# Altium PCB PCB_EIT_Spectra.pcbdoc (part 1 of 2)
Units mil, origin at the board's own origin, x right, y up, seen from the top; angles counter-clockwise.
Board outline 4400 x 3850 mil, 2 copper layers (Top Layer, Bottom Layer); 90 components, 116 nets, 615 pads, 256 vias.
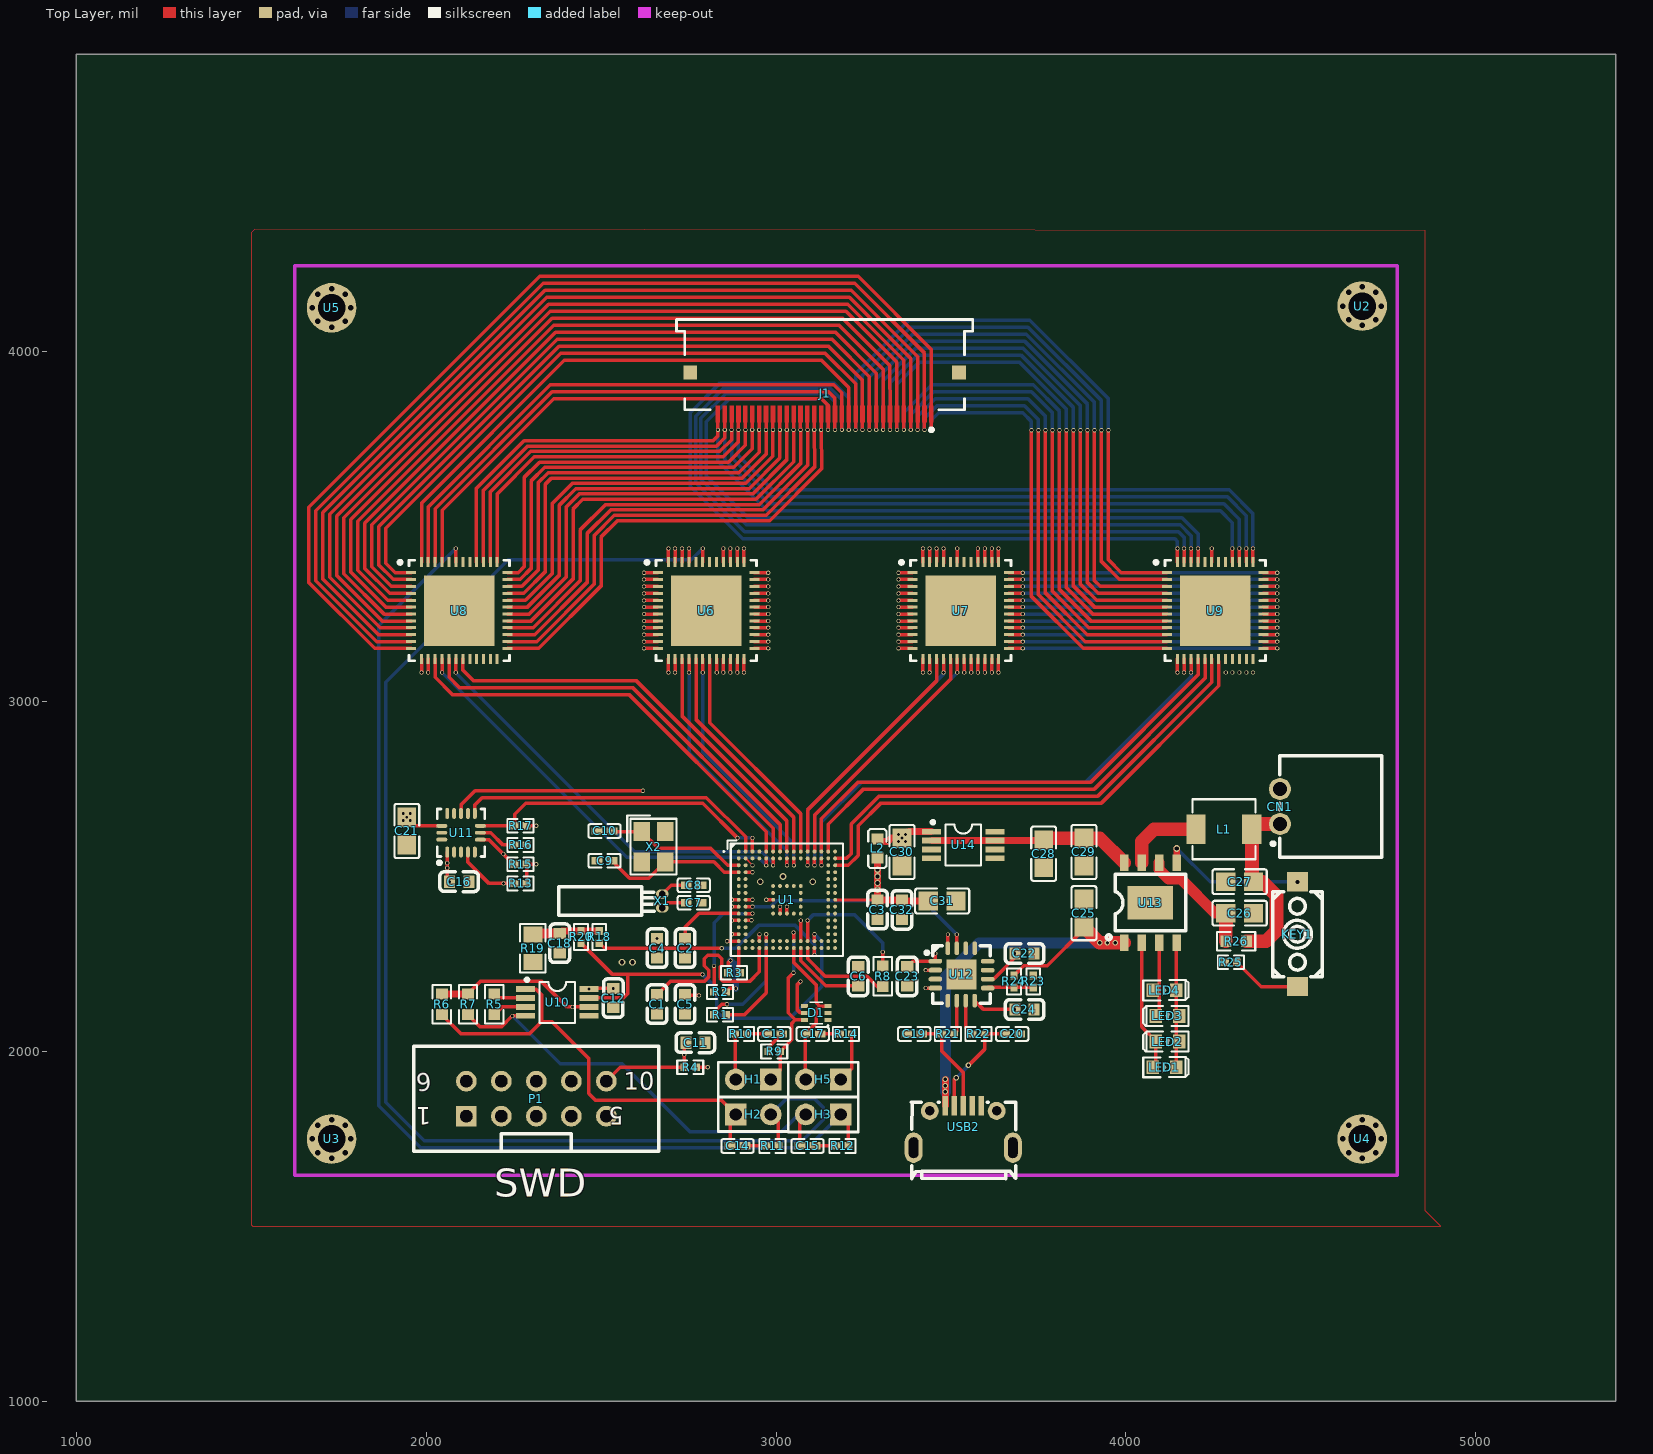
[diagram p0: Top Layer view]
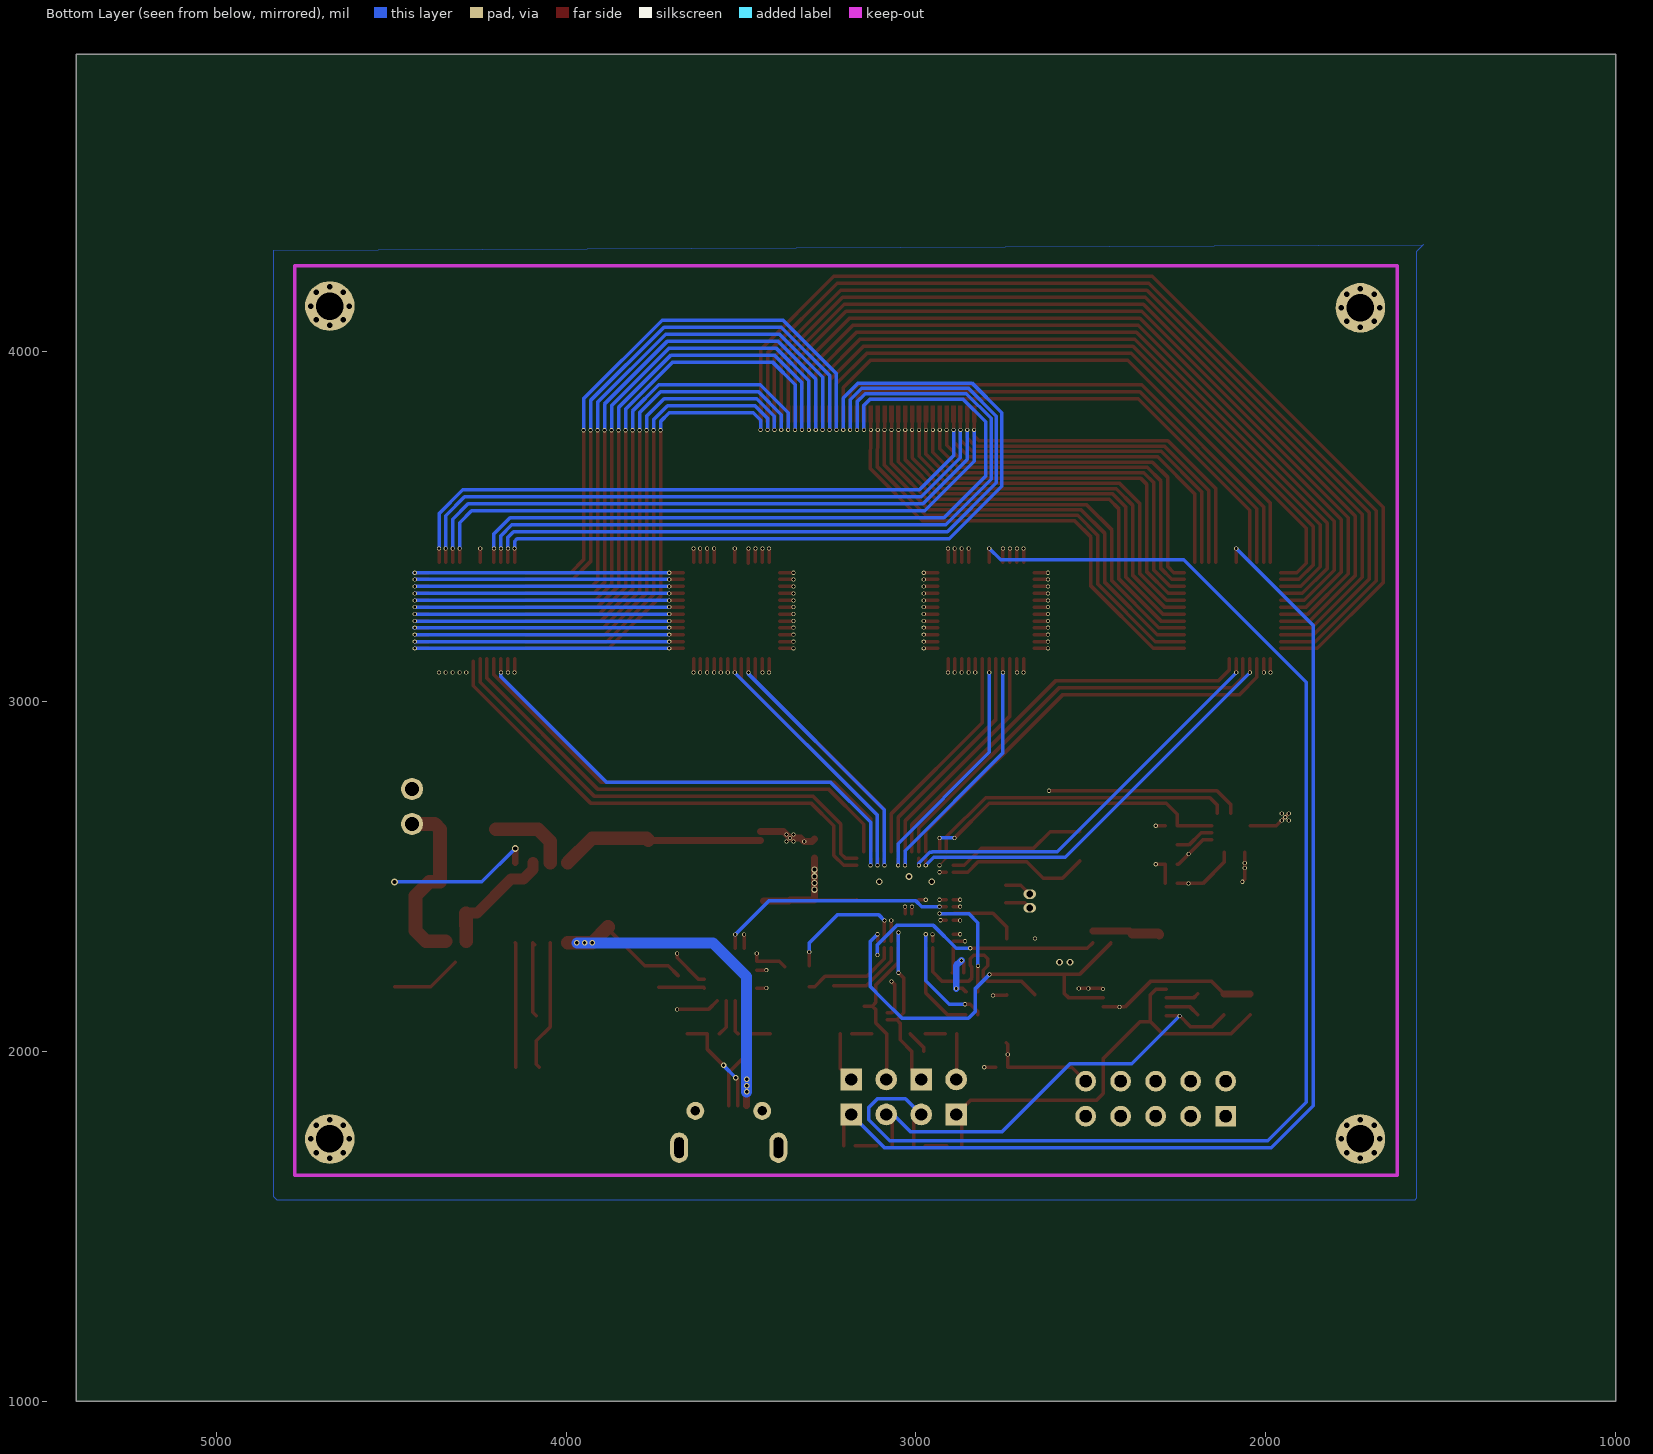
[diagram p1: Bottom Layer view, seen from below]

## Layer stack, top to bottom
Top Layer: signal copper (thickness not stored)
Dielectric: dielectric 12.6, FR-4, Dk 4.8
Bottom Layer: signal copper (thickness not stored)

## Board outline
5400,1000 1000,1000 1000,4850 5400,4850

## Components (designator, comment, footprint, x,y, rotation, side; value= is the part's Value field where it differs from the comment)
C1 "0.47u" C0603 2660,2135 r270 top
C2 "0.47u" C0603 2740,2295 r270 top
C3 "0.47u" C0603 3290,2405 r270 top
C4 "0.1u" C0603 2660,2295 r270 top
C5 "0.47u" C0603 2740,2135 r270 top
C6 "4.7u" C0603 3235,2215 r90 top
C7 "4pf" C0402 2765,2425 r180 top
C8 "4pf" C0402 2765,2475 r180 top
C9 "12pf" C0402 2510,2545 r180 top
C10 "12pf" C0402 2510,2630 r0 top
C11 "0.1u" C0603 2770,2025 r0 top
C12 "0.1u" C0603 2535,2152.56 r90 top
C13 "47n" C0402 2995,2050 r0 top
C14 "47n" C0402 2890,1730 r180 top
C15 "47n" C0402 3090,1730 r180 top
C16 "0.1u" C0603 2095,2485 r0 top
C17 "47n" C0402 3105,2050 r180 top
C18 "0.1u" C0603 2382.24,2309.61 r90 top
C19 "47p" C0402 3395,2050 r0 top
C20 "47p" C0402 3675,2050 r180 top
C21 "10U" C0805 1945,2630 r90 top
C22 "0.1u" C0603 3710,2280 r180 top
C23 "4.7u" C0603 3375,2215 r90 top
C24 "0.1u" C0603 3710,2120 r180 top
C25 "10u" C0805 3880,2395 r270 top
C26 "22u" C0805 4325,2395 r180 top
C27 "22u" C0805 4325,2485 r0 top
C28 "22u" C0805 3765,2565 r90 top
C29 "22u" C0805 3880,2570 r90 top
C30 "10u" C0805 3360,2570 r90 top
C31 "10u" C0805 3475,2430 r180 top
C32 "0.1u" C0603 3360,2405 r90 top
CN1 "XH-2AW_C2908611" CONN-TH_XH-2AW_C2908611 4440,2700 r90 top
D1 "SP3004-04XTG" SOT-563_L1.6-W1.2-P0.50-LS1.6-BR 3115,2110 r0 top
H1 "HDR-F-2.54_1x2" HDR-F-2.54_1X2 2935,1920 r180 top
H2 "HDR-F-2.54_1x2" HDR-F-2.54_1X2 2935,1820 r0 top
H3 "HDR-F-2.54_1x2" HDR-F-2.54_1X2 3135,1820 r180 top
H5 "HDR-F-2.54_1x2" HDR-F-2.54_1X2 3135,1920 r180 top
J1 "54104-3231" MOLX-54104-3231 2755,3940 r180 top
KEY1 "K2-3.6×6.1_SMD" KEY-SMD_2P-L6.2-W3.6-LS8.0 4490,2335 r270 top
L1 "1uH" IND-SMD_L4.4-W4.2 4280,2635 r180 top
L2 "600Ω" L0603 3290,2580 r90 top
LED1 "LED-0603_R" LED0603_RED 4110,1955 r0 top
LED2 "LED-0603_R" LED0603_RED 4118.27,2028.33 r180 top
LED3 "LED-0603_R" LED0603_RED 4118.27,2101.67 r180 top
LED4 "LED-0603_R" LED0603_RED 4110,2175 r0 top
P1 "DC3-10P" DC3-10P-2.54 2115,1815 r0 top
R1 "1k" R0402 2840,2105 r180 top
R2 "560R" R0402 2840,2170 r0 top
R3 "560R" R0402 2880,2225 r0 top
R4 "10k" R0402 2755,1955 r180 top
R5 "100k" R0603 2195,2135 r270 top
R6 "1k" R0603 2045,2135 r90 top
R7 "1k" R0603 2120,2135 r270 top
R8 "33k" R0603 3304.89,2215 r270 top
R9 "3k" R0402 2995,2000 r180 top
R10 "4k7" R0402 2900,2050 r180 top
R11 "4k7" R0402 2990,1730 r0 top
R12 "4k7" R0402 3190,1730 r0 top
R13 "4k7" R0402 2270,2480 r0 top
R14 "4k7" R0402 3200,2050 r0 top
R15 "4k7" R0402 2270,2535 r0 top
R16 "4k7" R0402 2270,2590 r180 top
R17 "4k7" R0402 2270,2645 r0 top
R18 "22.6k" R0402 2495,2327.16 r270 top
R19 "47K" R0805 2305,2295 r90 top
R20 "0k" R0402 2442.78,2327.16 r270 top
R21 "27k" R0402 3491.28,2050 r0 top
R22 "27k" R0402 3578.72,2050 r180 top
R23 "10k" R0402 3735,2200 r90 top
R24 "4k7" R0402 3680,2200 r90 top
R25 "10k" R0402 4300,2255 r0 top
R26 "0.5R" R0603 4315,2315 r0 top
U1 "ADUCM350BBCZ" TFBGA-120_L8.0-W8.0-P0.50-TL 3031.22,2433.49 r0 top
U2 "M2定位孔" M2定位孔 4675,4130 r0 top
U3 "M2定位孔" M2定位孔 1730,1750 r0 top
U4 "M2定位孔" M2定位孔 4675,1750 r0 top
U5 "M2定位孔" M2定位孔 1730,4125 r0 top
U6 "ADG732BCPZ-REEL" ADI-CP-48-1-NO_DRILL 2800.51,3260 r0 top
U7 "ADG732BCPZ-REEL" ADI-CP-48-1-NO_DRILL 3527.75,3260 r0 top
U8 "ADG732BCPZ-REEL" ADI-CP-48-1-NO_DRILL 2095,3260 r0 top
U9 "ADG732BCPZ-REEL" ADI-CP-48-1-NO_DRILL 4255,3260 r0 top
U10 "AD8226ARMZ_C652548" MSOP-8_L3.0-W3.0-P0.65-LS4.9-BL 2375,2140 r270 top
U11 "LIS3DHTR_C15134" LGA-16_L3.0-W3.0-P0.50-TL 2100,2625 r90 top
U12 "FT230XQ-R" QFN-16_L4.0-W4.0-P0.65-BL-EP2.2 3530,2220 r270 top
U13 "IP5306" ESOP-8_L4.9-W3.9-P1.27-LS6.0-BL-EP 4070,2425 r0 top
U14 "ADP3333ARMZ-3.3-R7" MSOP-8_L3.0-W3.0-P0.65-LS4.9-BL 3535,2590 r270 top
USB2 "MICROXNJ" MICRO-USB-SMD_MICROXNJ 3535,1785 r0 top
X1 "32.768KHz" OSC-TH_BD2.1-P0.70-D0.3 2675,2430 r0 top
X2 "TSX-3225 16.0000MF18X-AC6" CRYSTAL-SMD_4P-L3.2-W2.5-BL 2650,2585 r270 top

## Footprints (in the part's own frame and the unit in brackets; to place one, negate y for a bottom-side part, rotate by r counter-clockwise, add the part's x,y. Pads: shape width x height; smd on the part's side, far side on the other; paste and mask are expansions set on the pad)
ADI-CP-48-1-NO_DRILL [mil]
  rect 28.5x8.5 smd: 1(-138,108) 2(-138,89) 3(-138,69) 4(-138,49) 5(-138,29) 6(-138,10) 7(-138,-10) 8(-138,-30) 9(-138,-49) 10(-138,-69) 11(-138,-89) 12(-138,-108) 25(138,-108) 26(138,-89) 27(138,-69) 28(138,-49) 29(138,-30) 30(138,-10) 31(138,10) 32(138,29) 33(138,49) 34(138,69) 35(138,89) 36(138,108)
  rect 8.5x28.5 smd: 13(-108,-138) 14(-89,-138) 15(-69,-138) 16(-49,-138) 17(-29,-138) 18(-10,-138) 19(10,-138) 20(30,-138) 21(49,-138) 22(69,-138) 23(89,-138) 24(108,-138) 37(108,138) 38(89,138) 39(69,138) 40(49,138) 41(30,138) 42(10,138) 43(-10,138) 44(-29,138) 45(-49,138) 46(-69,138) 47(-89,138) 48(-108,138)
  rect 201.5x201.5 smd: 49(0,0)
  silkscreen extent -174,-144 144,144
C0402 [mm]
  rect 0.79x0.54 smd: 1(-0.545,0) 2(0.545,0)
  silkscreen extent -1.17,-0.5 1.17,0.5
C0603 [mm]
  rect 0.8x0.9 smd: 1(-0.7,0) 2(0.7,0)
  silkscreen extent -1.41,-0.71 1.39,0.72
C0805 [mm]
  rect 1.41x1.35 smd: 1(-1,0) 2(1,0)
  silkscreen extent -1.96,-0.9 1.96,0.9
CONN-TH_XH-2AW_C2908611 [mm]
  round 1.6 hole 1: 1(-1.27,0) 2(1.27,0)
  silkscreen extent -3.7,-7.4 3.7,0.6
CRYSTAL-SMD_4P-L3.2-W2.5-BL [mm]
  rect 1.4x1.2 smd: 1(-1.1,-0.85) 2(1.1,-0.85) 3(1.1,0.85) 4(-1.1,0.85)
  silkscreen extent -2.26,-1.91 2.03,1.68
DC3-10P-2.54 [mil]
  rect 59.06x59.06 hole 35.44 slot 35.45 at 0 deg: 1(0,0)
  round 59.06 hole 35.44 slot 35.45 at 0 deg: 2(100,0) 3(200,0) 4(300,0) 5(400,0) 6(0,100) 7(100,100) 8(200,100) 9(300,100) 10(400,100)
  silkscreen extent -150,-100 550,200
ESOP-8_L4.9-W3.9-P1.27-LS6.0-BL-EP [mm]
  rect 0.6x1.2 smd: 1(-1.905,-2.908) 2(-0.635,-2.908) 3(0.635,-2.908) 4(1.905,-2.908) 5(1.905,2.908) 6(0.635,2.908) 7(-0.635,2.908) 8(-1.905,2.908)
  rect 3.3x2.4 smd: 9(0,0)
  silkscreen extent -3.2,-2.67 2.55,2.05
HDR-F-2.54_1X2 [mil]
  rect 62x62 hole 35: 1(-50,0)
  round 62 hole 35: 2(50,0)
  silkscreen extent -100,-49 100,50
IND-SMD_L4.4-W4.2 [mm]
  rect 1.4x2.12 smd: 1(2.028,0) 2(-2.028,0)
  silkscreen extent -2.28,-2.18 2.28,2.18
KEY-SMD_2P-L6.2-W3.6-LS8.0 [mm]
  rect 1.4x1.5 smd: 1(-3.8,0) 2(3.8,0)
  silkscreen extent -3.1,-1.8 3.1,1.8
L0603 [mm]
  rect 0.8x0.864 smd: 1(-0.7,0) 2(0.7,0)
  silkscreen extent -1.42,-0.65 1.41,0.67
LED0603_RED [mm]
  rect 0.9x1 smd: 1(-0.85,0) 2(0.85,0)
  silkscreen extent -1.54,-0.73 1.75,0.73
LGA-16_L3.0-W3.0-P0.50-TL [mm]
  oval 0.8x0.28 smd: 1(-1.4,1) 2(-1.4,0.5) 3(-1.4,0) 4(-1.4,-0.5) 5(-1.4,-1) 9(1.4,-1) 10(1.4,-0.5) 11(1.4,0) 12(1.4,0.5) 13(1.4,1)
  oval 0.28x0.8 smd: 6(-0.5,-1.4) 7(0,-1.4) 8(0.5,-1.4) 14(0.5,1.4) 15(0,1.4) 16(-0.5,1.4)
  silkscreen extent -2.3,-1.72 1.73,1.73
M2定位孔 [mm]
  round 0.6 hole 0.4: GND(-1.4,0) GND(-0.99,-0.99) GND(-0.99,0.99) GND(0,1.4) GND(0,-1.4) GND(0.99,-0.99) GND(0.99,0.99) GND(1.4,0)
  round 3.6 hole 2: GND(0,0)
MICRO-USB-SMD_MICROXNJ [mm]
  rect 0.4x1.4 smd: 1(-1.3,1.521) 2(-0.65,1.521) 3(0,1.521) 4(0.65,1.521) 5(1.3,1.521)
  round 1.3 hole 0.7: 6(2.425,1.149) 9(-2.425,1.149)
  oval 1.3x2.2 hole 0.7 slot 1.5 at 90 deg: 7(3.6,-1.521) 8(-3.6,-1.521)
  silkscreen extent -3.76,-3.78 3.8,1.79
MOLX-54104-3231 [mm]
  round 0 smd: 1(-17.5,3) 2(-17,3) 3(-16.5,3) 4(-16,3) 5(-15.5,3) 6(-15,3) 7(-14.5,3) 8(-14,3) 9(-13.5,3) 10(-13,3) 11(-12.5,3) 12(-12,3) 13(-11.5,3) 14(-11,3) 15(-10.5,3) 16(-10,3) 17(-9.5,3) 18(-9,3) 19(-8.5,3) 20(-8,3) 21(-7.5,3) 22(-7,3) 23(-6.5,3) 24(-6,3) 25(-5.5,3) 26(-5,3) 27(-4.5,3) 28(-4,3) 29(-3.5,3) 30(-3,3) 31(-2.5,3) 32(-2,3)
  rect 1x1 smd: MP1(-19.5,0) MP2(0,0)
  Top Layer region: -3.15,3.6 -2.85,3.6 -2.85,2.4 -3.15,2.4
  Top Layer region: -3.65,3.6 -3.35,3.6 -3.35,2.4 -3.65,2.4
  Top Layer region: -4.15,3.6 -3.85,3.6 -3.85,2.4 -4.15,2.4
  Top Layer region: -4.65,3.6 -4.35,3.6 -4.35,2.4 -4.65,2.4
  Top Layer region: -5.15,3.6 -4.85,3.6 -4.85,2.4 -5.15,2.4
  Top Layer region: -5.65,3.6 -5.35,3.6 -5.35,2.4 -5.65,2.4
  Top Layer region: -6.15,3.6 -5.85,3.6 -5.85,2.4 -6.15,2.4
  Top Layer region: -6.65,3.6 -6.35,3.6 -6.35,2.4 -6.65,2.4
  Top Layer region: -7.15,3.6 -6.85,3.6 -6.85,2.4 -7.15,2.4
  Top Layer region: -7.65,3.6 -7.35,3.6 -7.35,2.4 -7.65,2.4
  Top Layer region: -8.15,3.6 -7.85,3.6 -7.85,2.4 -8.15,2.4
  Top Layer region: -8.65,3.6 -8.35,3.6 -8.35,2.4 -8.65,2.4
  Top Layer region: -9.15,3.6 -8.85,3.6 -8.85,2.4 -9.15,2.4
  Top Layer region: -9.65,3.6 -9.35,3.6 -9.35,2.4 -9.65,2.4
  Top Layer region: -10.15,3.6 -9.85,3.6 -9.85,2.4 -10.15,2.4
  Top Layer region: -10.65,3.6 -10.35,3.6 -10.35,2.4 -10.65,2.4
  Top Layer region: -11.15,3.6 -10.85,3.6 -10.85,2.4 -11.15,2.4
  Top Layer region: -11.65,3.6 -11.35,3.6 -11.35,2.4 -11.65,2.4
  Top Layer region: -12.15,3.6 -11.85,3.6 -11.85,2.4 -12.15,2.4
  Top Layer region: -12.65,3.6 -12.35,3.6 -12.35,2.4 -12.65,2.4
  Top Layer region: -13.15,3.6 -12.85,3.6 -12.85,2.4 -13.15,2.4
  Top Layer region: -13.65,3.6 -13.35,3.6 -13.35,2.4 -13.65,2.4
  Top Layer region: -14.15,3.6 -13.85,3.6 -13.85,2.4 -14.15,2.4
  Top Layer region: -14.65,3.6 -14.35,3.6 -14.35,2.4 -14.65,2.4
  Top Layer region: -15.15,3.6 -14.85,3.6 -14.85,2.4 -15.15,2.4
  Top Layer region: -15.65,3.6 -15.35,3.6 -15.35,2.4 -15.65,2.4
  Top Layer region: -16.15,3.6 -15.85,3.6 -15.85,2.4 -16.15,2.4
  Top Layer region: -16.65,3.6 -16.35,3.6 -16.35,2.4 -16.65,2.4
  Top Layer region: -17.15,3.6 -16.85,3.6 -16.85,2.4 -17.15,2.4
  Top Layer region: -17.65,3.6 -17.35,3.6 -17.35,2.4 -17.65,2.4
  Top Layer region: -2.65,3.6 -2.35,3.6 -2.35,2.4 -2.65,2.4
  Top Layer region: -2.15,3.6 -1.85,3.6 -1.85,2.4 -2.15,2.4
  silkscreen extent -20.5,-3.85 1,4.27
MSOP-8_L3.0-W3.0-P0.65-LS4.9-BL [mil]
  rect 15.98x55 smd: 1(-38.39,-90.55) 2(-12.8,-90.55) 3(12.8,-90.55) 4(38.39,-90.55) 5(38.39,90.55) 6(12.8,90.56) 7(-12.8,90.55) 8(-38.39,90.55)
  silkscreen extent -70,-91 59,51
OSC-TH_BD2.1-P0.70-D0.3 [mm]
  oval 0.9x0.7 hole 0.5: 1(0,0.5) 2(0,-0.5)
  silkscreen extent -7.5,-1.05 -0.57,1.05
QFN-16_L4.0-W4.0-P0.65-BL-EP2.2 [mm]
  oval 0.35x1 smd: 1(-0.965,-1.9) 2(-0.315,-1.9) 3(0.335,-1.9) 4(0.986,-1.9) 9(0.991,1.9) 10(0.34,1.9) 11(-0.31,1.9) 12(-0.96,1.9)
  oval 1x0.35 smd: 5(1.9,-0.991) 6(1.9,-0.34) 7(1.9,0.31) 8(1.9,0.96) 13(-1.9,0.96) 14(-1.9,0.31) 15(-1.9,-0.34) 16(-1.9,-0.991)
  rect 2.2x2.2 smd: 17(0,0)
  silkscreen extent -2.11,-2.64 2.1,2.1
R0402 [mm]
  rect 0.566x0.54 smd: 1(-0.433,0) 2(0.433,0)
  silkscreen extent -0.94,-0.5 0.94,0.5
R0603 [mil]
  rect 31.75x34.02 smd: 1(-29.66,0) 2(29.66,0)
  silkscreen extent -55,-26 55,26
R0805 [mil]
  rect 44.59x54.21 smd: 1(-39.37,0) 2(39.37,0)
  silkscreen extent -69,-36 69,36
SOT-563_L1.6-W1.2-P0.50-LS1.6-BR [mm]
  rect 0.5x0.3 smd: 1(0.85,-0.5) 2(0.85,0) 3(0.85,0.5) 4(-0.85,0.5) 5(-0.85,0) 6(-0.85,-0.5)
  silkscreen extent -0.48,-0.99 0.9,0.79
TFBGA-120_L8.0-W8.0-P0.50-TL [mm]
  round 0.28 smd: A1(-3.5,3.5) A2(-3,3.5) A3(-2.5,3.5) A4(-2,3.5) A5(-1.5,3.5) A6(-1,3.5) A7(-0.5,3.5) A8(0,3.5) A9(0.5,3.5) A10(1,3.5) A11(1.5,3.5) A12(2,3.5) A13(2.5,3.5) A14(3,3.5) A15(3.5,3.5) B1(-3.5,3) B2(-3,3) B3(-2.5,3) B4(-2,3) B5(-1.5,3) B6(-1,3) B7(-0.5,3) B8(0,3) B9(0.5,3) B10(1,3) B11(1.5,3) B12(2,3) B13(2.5,3) B14(3,3) B15(3.5,3) C1(-3.5,2.5) C2(-3,2.5) C14(3,2.5) C15(3.5,2.5) D1(-3.5,2) D2(-3,2) D14(3,2) D15(3.5,2) E1(-3.5,1.5) E2(-3,1.5) E14(3,1.5) E15(3.5,1.5) F1(-3.5,1) F2(-3,1) F6(-1,1) F7(-0.5,1) F8(0,1) F9(0.5,1) F10(1,1) F14(3,1) F15(3.5,1) G1(-3.5,0.5) G2(-3,0.5) G6(-1,0.5) G10(1,0.5) G14(3,0.5) G15(3.5,0.5) H1(-3.5,0) H2(-3,0) H6(-1,0) H10(1,0) H14(3,0) H15(3.5,0) J1(-3.5,-0.5) J2(-3,-0.5) J6(-1,-0.5) J10(1,-0.5) J14(3,-0.5) J15(3.5,-0.5) K1(-3.5,-1) K2(-3,-1) K6(-1,-1) K7(-0.5,-1) K8(0,-1) K9(0.5,-1) K10(1,-1) K14(3,-1) K15(3.5,-1) L1(-3.5,-1.5) L2(-3,-1.5) L14(3,-1.5) L15(3.5,-1.5) M1(-3.5,-2) M2(-3,-2) M14(3,-2) M15(3.5,-2) N1(-3.5,-2.5) N2(-3,-2.5) N14(3,-2.5) N15(3.5,-2.5) P1(-3.5,-3) P2(-3,-3) P3(-2.5,-3) P4(-2,-3) P5(-1.5,-3) P6(-1,-3) P7(-0.5,-3) P8(0,-3) P9(0.5,-3) P10(1,-3) P11(1.5,-3) P12(2,-3) P13(2.5,-3) P14(3,-3) P15(3.5,-3) R1(-3.5,-3.5) R2(-3,-3.5) R3(-2.5,-3.5) R4(-2,-3.5) R5(-1.5,-3.5) R6(-1,-3.5) R7(-0.5,-3.5) R8(0,-3.5) R9(0.5,-3.5) R10(1,-3.5) R11(1.5,-3.5) R12(2,-3.5) R13(2.5,-3.5) R14(3,-3.5) R15(3.5,-3.5)
  silkscreen extent -4.63,-4.08 4.08,4.3

## Via types
v1: diameter 11.81, hole 7.87, Top Layer to Bottom Layer, tented both sides, 237 vias
v2: diameter 15.75, hole 9.84, Top Layer to Bottom Layer, tented both sides, 8 vias
v3: diameter 19.69, hole 11.81, Top Layer to Bottom Layer, tented both sides, 7 vias
v4: diameter 17.72, hole 11.81, Top Layer to Bottom Layer, tented both sides, 4 vias

## Nets (pads, with @x,y where several pads share a name; then routed paths per layer and width w, separated by ;. In a path a pad name is that pad's centre, name@x,y a point inside that pad or via, vN(x,y) a via of type N, cw(c..) or ccw(c..) an arc to the next point about the centre after c; other vN are vias at no path point)
1: J1.1 U6.12 U7.12 U8.12 U9.12 | length 10101.5
  Top Layer w10: U8.12@1957,3152 1853,3152 1665,3340 1665,3555 2325,4215 3235,4215 3444,4006 J1.1@3443.98,3821.89 v1(3443.98,3776.26) ; v1(2623.12,3152) U6.12@2662.51,3151.99 ; v1(3350.38,3152) U7.12@3389.75,3152 ; v1(3729.99,3775.01) 3729.99,3300.01 3878,3152 U9.12@4117,3152
  Mid-Layer 2 w10: v1(2623.12,3152) 2548,3152 2340,3360 2340,3875 2640,4175 3205,4175 3444,3936 v1(3443.98,3776.26)
  Mid-Layer 3 w10: v1(3350.38,3152) 3217,3152 3172.2,3107.2 3172.2,3007.2 3000,2835 2600,2835 2365,3070 2365,3740 2765,4140 3215,4140 3443.98,3911.02 v1(3443.98,3776.26)
  Bottom Layer w10: v1(3443.98,3776.26) 3444,3804 3465,3825 3705,3825 3730,3800 v1(3729.99,3775.01)
2: J1.2 U6.11 U7.11 U8.11 U9.11 | length 9847
  Top Layer w10: U8.11@1957,3171 1859,3171 1685,3345 1685,3545 2335,4195 3225,4195 3424.29,3995.71 J1.2@3424.29,3821.89 v1(3424.29,3776.26) ; v1(2623.12,3171) U6.11@2662.51,3170.99 ; v1(3350.38,3171) U7.11@3389.75,3171 ; v1(3749.99,3775.01) 3749.99,3305.01 3884,3171 U9.11@4117,3171
  Mid-Layer 2 w10: v1(2623.12,3171) 2554,3171 2360,3365 2360,3870 2645,4155 3200,4155 3424.3,3930.7 v1(3424.29,3776.26)
  Mid-Layer 3 w10: v1(3350.38,3171) 3211,3171 3157,3117 3157,3017 2995,2855 2605,2855 2385,3075 2385,3735 2770,4120 3210,4120 3424.29,3905.71 v1(3424.29,3776.26)
  Bottom Layer w10: v1(3424.29,3776.26) 3424.3,3809.3 3460,3845 3710,3845 3750,3805 v1(3749.99,3775.01)
3: J1.3 U6.10 U7.10 U8.10 U9.10 | length 9594.8
  Top Layer w10: U8.10@1957,3191 1864,3191 1705,3350 1705,3540 2340,4175 3215,4175 3404.6,3985.4 J1.3@3404.61,3821.89 v1(3404.61,3776.26) ; v1(2623.12,3191) U6.10@2662.51,3190.99 ; v1(3350.38,3191) U7.10@3389.75,3191 ; v1(3769.99,3775.01) 3769.99,3310.01 3889,3191 U9.10@4117,3191
  Mid-Layer 2 w10: v1(2623.12,3191) 2559,3191 2380,3370 2380,3865 2650,4135 3190,4135 3405,3920 v1(3404.61,3776.26)
  Mid-Layer 3 w10: v1(3350.38,3191) 3206,3191 3141.8,3126.8 3141.8,3026.8 2990,2875 2610,2875 2405,3080 2405,3730 2775,4100 3205,4100 3404.61,3900.39 v1(3404.61,3776.26)
  Bottom Layer w10: v1(3404.61,3776.26) 3404.61,3814.61 3455,3865 3720,3865 3769.99,3815.01 v1(3769.99,3775.01)
4: J1.4 U6.9 U7.9 U8.9 U9.9 | length 9348.1
  Top Layer w10: U8.9@1957,3211 1869,3211 1725,3355 1725,3535 2345,4155 3210,4155 3384.9,3980.1 J1.4@3384.92,3821.89 v1(3384.92,3776.26) ; v1(2623.12,3211) U6.9@2662.51,3210.99 ; v1(3350.38,3211) U7.9@3389.75,3211 ; v1(3789.99,3775.01) 3789.99,3315.01 3894,3211 U9.9@4117,3211
  Mid-Layer 2 w10: v1(2623.12,3211) 2564,3211 2400,3375 2400,3860 2655,4115 3185,4115 3384.92,3915.08 v1(3384.92,3776.26)
  Mid-Layer 3 w10: v1(3350.38,3211) 3201,3211 3126.6,3136.6 3126.6,3036.6 2985,2895 2615,2895 2425,3085 2425,3725 2780,4080 3200,4080 3384.9,3895.1 v1(3384.92,3776.26)
  Bottom Layer w10: v1(3384.92,3776.26) 3384.92,3819.92 3450,3885 3730,3885 3789.99,3825.01 v1(3789.99,3775.01)
5: J1.5 U6.8 U7.8 U8.8 U9.8 | length 9099.3
  Top Layer w10: U8.8@1957,3230 1875,3230 1745,3360 1745,3530 2350,4135 3205,4135 3365,3975 J1.5@3365.24,3821.89 ; v1(2623.12,3230) U6.8@2662.51,3229.99 ; v1(3350.38,3230) U7.8@3389.75,3230 ; v1(3365.24,3776.26) J1.5@3365.24,3821.89 ; v1(3809.99,3775.01) 3809.99,3320.01 3900,3230 U9.8@4117,3230
  Mid-Layer 2 w10: v1(2623.12,3230) 2570,3230 2420,3380 2420,3855 2660,4095 3180,4095 3365,3910 v1(3365.24,3776.26)
  Mid-Layer 3 w10: v1(3350.38,3230) 3195,3230 3111.4,3146.4 3111.4,3046.4 2980,2915 2620,2915 2445,3090 2445,3720 2785,4060 3195,4060 3365.24,3889.76 v1(3365.24,3776.26)
  Bottom Layer w10: v1(3365.24,3776.26) 3365.24,3825.24 3445,3905 3735,3905 3809.99,3830.01 v1(3809.99,3775.01)
6: J1.6 U6.7 U7.7 U8.7 U9.7 | length 8930.8
  Top Layer w10: U8.7@1957,3250 1880,3250 1765,3365 1765,3525 2355,4115 3200,4115 3345,3970 J1.6@3345.55,3821.89 ; v1(2623.12,3250) U6.7@2662.51,3249.99 ; v1(3345.55,3776.26) J1.6@3345.55,3821.89 ; v1(3350.38,3250) U7.7@3389.75,3250 ; v1(3829.99,3775.01) 3829.99,3325.01 3905,3250 U9.7@4117,3250
  Mid-Layer 2 w10: v1(2623.12,3250) 2575,3250 2440,3385 2440,3850 2665,4075 3175,4075 3345,3905 v1(3345.55,3776.26)
  Mid-Layer 3 w10: v1(3345.55,3776.26) 3345.55,3884.45 3190,4040 2790,4040 2465,3715 2465,3095 2625,2935 2975,2935 3096.2,3056.2 3096.2,3156.2 3190,3250 v1(3350.38,3250)
  Bottom Layer w10: v1(3345.55,3776.26) 3345.55,3905.55 3410,3970 3695,3970 3829.99,3835.01 v1(3829.99,3775.01)
7: J1.7 U6.6 U7.6 U8.6 U9.6 | length 8678.6
  Top Layer w10: U8.6@1957,3270 1885,3270 1785,3370 1785,3520 2360,4095 3190,4095 3325,3960 J1.7@3325.87,3821.89 ; v1(2623.12,3270) U6.6@2662.51,3269.99 ; v1(3325.87,3776.26) J1.7@3325.87,3821.89 ; v1(3350.38,3270) U7.6@3389.75,3270 ; v1(3849.99,3775.01) 3849.99,3330.01 3910,3270 U9.6@4117,3270
  Mid-Layer 2 w10: v1(2623.12,3270) 2580,3270 2460,3390 2460,3845 2670,4055 3170,4055 3325.9,3899.1 v1(3325.87,3776.26)
  Mid-Layer 3 w10: v1(3325.87,3776.26) 3325.87,3879.13 3185,4020 2795,4020 2485,3710 2485,3100 2630,2955 2970,2955 3081,3066 3081,3166 3185,3270 v1(3350.38,3270)
  Bottom Layer w10: v1(3325.87,3776.26) 3325.87,3910.87 3405,3990 3700,3990 3849.99,3840.01 v1(3849.99,3775.01)
8: J1.8 U6.5 U7.5 U8.5 U9.5 | length 8427.3
  Top Layer w10: U8.5@1957,3289 1891,3289 1805,3375 1805,3515 2365,4075 3180,4075 3306.2,3948.8 J1.8@3306.18,3821.89 v1(3306.18,3776.26) ; v1(2623.12,3289) U6.5@2662.51,3288.99 ; v1(3350.38,3289) U7.5@3389.75,3289 ; v1(3869.99,3775.01) 3869.99,3335.01 3916,3289 U9.5@4117,3289
  Mid-Layer 2 w10: v1(2623.12,3289) 2586,3289 2480,3395 2480,3840 2675,4035 3165,4035 3306.2,3893.8 v1(3306.18,3776.26)
  Mid-Layer 3 w10: v1(3306.18,3776.26) 3306.2,3873.8 3180,4000 2800,4000 2505,3705 2505,3105 2635,2975 2965,2975 3065.8,3075.8 3065.8,3175.8 3179,3289 v1(3350.38,3289)
  Bottom Layer w10: v1(3306.18,3776.26) 3306.18,3916.18 3400,4010 3705,4010 3869.99,3845.01 v1(3869.99,3775.01)
9: J1.9 U6.4 U7.4 U8.4 U9.4 | length 8172.1
  Top Layer w10: U8.4@1957,3309 1896,3309 1825,3380 1825,3510 2370,4055 3170,4055 3286.5,3938.5 J1.9@3286.5,3821.89 v1(3286.5,3776.26) ; v1(2623.12,3309) U6.4@2662.51,3308.99 ; v1(3350.38,3309) U7.4@3389.75,3309 ; v1(3889.99,3775.01) 3889.99,3340.01 3921,3309 U9.4@4117,3309
  Mid-Layer 2 w10: v1(2623.12,3309) 2591,3309 2500,3400 2500,3835 2680,4015 3160,4015 3285,3890 3285,3777.76 v1(3286.5,3776.26)
  Mid-Layer 3 w10: v1(3286.5,3776.26) 3286.5,3868.5 3175,3980 2810,3980 2525,3695 2525,3110 2640,2995 2960,2995 3050.6,3085.6 3050.6,3185.6 3174,3309 v1(3350.38,3309)
  Bottom Layer w10: v1(3286.5,3776.26) 3286.5,3921.5 3395,4030 3710,4030 3889.99,3850.01 v1(3889.99,3775.01)
10: J1.10 U6.3 U7.3 U8.3 U9.3 | length 7919.6
  Top Layer w10: U8.3@1957,3329 1901,3329 1845,3385 1845,3505 2375,4035 3160,4035 3266.8,3928.2 J1.10@3266.81,3821.89 v1(3266.81,3776.26) ; v1(2623.12,3329) U6.3@2662.51,3328.99 ; v1(3350.38,3329) U7.3@3389.75,3329 ; v1(3909.99,3775.01) 3909.99,3345.01 3926,3329 U9.3@4117,3329
  Mid-Layer 2 w10: v1(2623.12,3329) 2596,3329 2520,3405 2520,3830 2685,3995 3155,3995 3266.8,3883.2 v1(3266.81,3776.26)
  Mid-Layer 3 w10: v1(3266.81,3776.26) 3266.8,3863.2 3170,3960 2815,3960 2545,3690 2545,3115 2645,3015 2955,3015 3035.4,3095.4 3035.4,3195.4 3169,3329 v1(3350.38,3329)
  Bottom Layer w10: v1(3266.81,3776.26) 3266.81,3926.81 3390,4050 3715,4050 3909.99,3855.01 v1(3909.99,3775.01)
11: J1.11 U6.2 U7.2 U8.2 U9.2 | length 7632.1
  Top Layer w10: U8.2@1957,3349 1906,3349 1865,3390 1865,3500 2380,4015 3150,4015 3247.13,3917.87 J1.11@3247.13,3821.89 v1(3247.13,3776.26) ; v1(2623.12,3349) U6.2@2662.51,3348.99 ; v1(3350.38,3349) U7.2@3389.75,3349 ; v1(3929.99,3775.01) 3929.99,3400.01 3981,3349 U9.2@4117,3349
  Mid-Layer 2 w10: v1(2623.12,3349) 2601,3349 2540,3410 2540,3820 2695,3975 3145,3975 3247.1,3872.9 v1(3247.13,3776.26)
  Mid-Layer 3 w10: v1(3247.13,3776.26) 3247.1,3857.9 3165,3940 2820,3940 2565,3685 2565,3120 2650,3035 2950,3035 3020.2,3105.2 3020.2,3205.2 3164,3349 v1(3350.38,3349)
  Bottom Layer w10: v1(3247.13,3776.26) 3247.13,3932.13 3385,4070 3720,4070 3929.99,3860.01 v1(3929.99,3775.01)
12: J1.12 U6.1 U7.1 U8.1 U9.1 | length 7375.8
  Top Layer w10: U8.1@1957,3368 1912,3368 1885,3395 1885,3495 2385,3995 3140,3995 3227.4,3907.6 J1.12@3227.44,3821.89 ; v1(2623.12,3368) U6.1@2662.51,3367.99 ; v1(3227.44,3776.26) J1.12@3227.44,3821.89 ; v1(3350.38,3368) U7.1@3389.75,3368 ; v1(3949.99,3775.01) 3949.99,3405.01 3987,3368 U9.1@4117,3368
  Mid-Layer 2 w10: v1(2623.12,3368) 2605,3368 2560,3413 2560,3815 2700,3955 3130,3955 3227.4,3857.6 v1(3227.44,3776.26)
  Mid-Layer 3 w10: v1(3227.44,3776.26) 3227.4,3852.6 3160,3920 2825,3920 2585,3680 2585,3125 2655,3055 2893.3,3055 2915.13,3055 2945,3055 3005,3115 3005,3215 3158,3368 v1(3350.38,3368)
  Bottom Layer w10: v1(3227.44,3776.26) 3227.44,3937.44 3380,4090 3725,4090 3949.99,3865.01 v1(3949.99,3775.01)
13: J1.13 U6.48 U7.48 U8.48 U9.48 | length 6839.5
  Top Layer w10: U8.48@1987,3398 1987,3567 2395,3975 3130,3975 3207.8,3897.2 J1.13@3207.76,3821.89 ; U6.48@2692.51,3397.99 v1(2692.49,3437.37) ; v1(3207.76,3776.26) J1.13@3207.76,3821.89 ; U7.48@3419.75,3398 v1@3419.75,3437.37 ; U9.48@4147,3398 v1(4147,3437.37)
  Mid-Layer 2 w10: v1(2692.49,3437.37) 2692.5,3457.5 2580,3570 2580,3810 2705,3935 3120,3935 3207.8,3847.2 v1(3207.76,3776.26)
  Mid-Layer 3 w10: v1(3207.76,3776.26) 3207.8,3847.2 3155,3900 2835,3900 2755,3820 2755,3620 2937.6,3437.4 v1(3419.75,3437.37)
  Bottom Layer w10: v1(3207.76,3776.26) 3207.8,3867.2 3165,3910 2840,3910 2755,3825 2755,3615 2905,3465 4140,3465 4147,3458 v1(4147,3437.37)
14: J1.14 U6.47 U7.47 U8.47 U9.47 | length 6551.7
  Top Layer w10: U8.47@2006,3398 2006,3556 2355,3905 3165,3905 3188.1,3881.9 J1.14@3188.07,3821.89 ; U6.47@2711.51,3397.99 v1(2711.49,3437.37) ; v1(3188.07,3776.26) J1.14@3188.07,3821.89 ; U7.47@3438.75,3398 v1@3438.75,3437.37 ; U9.47@4166,3398 v1(4166,3437.37)
  Mid-Layer 2 w10: v1(2711.49,3437.37) 2711.5,3463.5 2600.2,3574.8 2600.2,3805.2 2710,3915 3110,3915 3188.1,3836.9 v1(3188.07,3776.26)
  Mid-Layer 3 w10: v1(3188.07,3776.26) 3188.07,3841.93 3150,3880 2840,3880 2775,3815 2775,3625 2941.79,3458.21 3431.79,3458.21 3438.75,3451.25 v1(3438.75,3437.37)
  Bottom Layer w10: v1(3188.07,3776.26) 3188.1,3861.9 3155.2,3894.8 2849.8,3894.8 2770.2,3815.2 2770.2,3624.8 2910,3485 4150,3485 4166,3469 v1(4166,3437.37)
15: J1.15 U6.46 U7.46 U8.46 U9.46 | length 6295.9
  Top Layer w10: U8.46@2026,3398 2026,3551 2360,3885 3150,3885 3168.4,3866.6 J1.15@3168.39,3821.89 v1(3168.39,3776.26) ; U6.46@2731.51,3397.99 v1(2731.49,3437.37) ; U7.46@3458.75,3400 v1@3458.75,3437.37 ; U9.46@4186,3398 v1(4186,3437.37)
  Mid-Layer 2 w10: v1(2731.49,3437.37) 2731.5,3473.5 2620,3585 2620,3800 2715,3895 3100,3895 3168.4,3826.6 v1(3168.39,3776.26)
  Mid-Layer 3 w10: v1(3168.39,3776.26) 3168.4,3826.6 3135,3860 2845,3860 2795,3810 2795,3630 2951.6,3473.4 3441.6,3473.4 3458.8,3456.2 v1(3458.75,3437.37)
  Bottom Layer w10: v1(3168.39,3776.26) 3168.4,3856.6 3145.4,3879.6 2856.1,3879.6 2785.4,3808.9 2785.4,3634.8 2915,3505 4155,3505 4186,3474 v1(4186,3437.37)
16: J1.16 U6.45 U7.45 U8.45 U9.45 | length 6037.5
  Top Layer w10: U8.45@2046,3398 2046.01,3546.01 2365,3865 3130,3865 3148.7,3846.3 J1.16@3148.7,3821.89 v1(3148.7,3776.26) ; U6.45@2751.51,3397.99 v1(2751.49,3437.37) ; U7.45@3478.75,3395 v1@3478.75,3437.37 ; U9.45@4206,3398 v1(4206,3437.37)
  Mid-Layer 2 w10: v1(2751.49,3437.37) 2751.5,3478.5 2640,3590 2640,3795 2719.4,3874.4 3095.6,3874.4 3148.7,3821.3 v1(3148.7,3776.26)
  Mid-Layer 3 w10: v1(3148.7,3776.26) 3148.7,3811.3 3125,3835 2845,3835 2815,3805 2815,3635 2961.2,3488.8 3451.2,3488.8 3478.8,3461.2 v1(3478.75,3437.37)
  Bottom Layer w10: v1(3148.7,3776.26) 3148.7,3846.3 3130.6,3864.4 2865.9,3864.4 2800.6,3799.1 2800.6,3644.4 2920,3525 4160,3525 4206,3479 v1(4206,3437.37)
17: J1.17 U6.25 U7.25 U8.25 U9.25 | length 4515
  Top Layer w10: U8.25@2233,3152 2322,3152 2500,3330 2500,3470 2547,3517 2982,3517 3130,3665 v1(3129.02,3776.26) ; U6.25@2938.51,3151.99 v1(2977.87,3152) ; v1(3129.02,3776.26) J1.17@3129.02,3821.89 ; U7.25@3665.75,3152 v1(3705.13,3152) ; U9.25@4393,3152 v1(4432.38,3152)
  Mid-Layer 2 w10: v1(2977.87,3152) 3092,3152 3240,3300 3240,3575 3130,3685 v1(3129.02,3776.26)
  Mid-Layer 3 w10: v1(3129.02,3776.26) 3129,3751 3147.7,3732.3 3712.7,3732.3 3970,3475 3970,3310 3812,3152 v1(3705.13,3152)
  Bottom Layer w10: v1(3705.13,3152) v1(4432.38,3152)
18: J1.18 U6.26 U7.26 U8.26 U9.26 | length 4425.5
  Top Layer w10: U8.26@2233,3171 2316,3171 2480,3335 2480,3474.1 2538.1,3532.2 2972.2,3532.2 3110,3670 v1(3109.33,3776.26) ; U6.26@2938.51,3170.99 v1(2977.87,3171) ; v1(3109.33,3776.26) J1.18@3109.33,3821.89 ; U7.26@3665.75,3171 v1(3705.13,3171) ; U9.26@4393,3171 v1(4432.38,3171)
  Mid-Layer 2 w10: v1(2977.87,3171) 3085,3170 3220,3305 3220,3570 3109.3,3680.7 v1(3109.33,3776.26)
  Mid-Layer 3 w10: v1(3109.33,3776.26) 3109.33,3735.67 3127.86,3717.14 3702.86,3717.14 3950,3470 3950,3320 3801,3171 v1(3705.13,3171)
  Bottom Layer w10: v1(3705.13,3171) v1(4432.38,3171)
19: J1.19 U6.27 U7.27 U8.27 U9.27 | length 4339.7
  Top Layer w10: U8.27@2233,3191 2311,3191 2460,3340 2460,3480 2527.41,3547.41 2962.41,3547.41 3090,3675 v1@3090,3780 ; U6.27@2938.51,3190.99 v1(2977.87,3191) ; v1(3089.65,3776.26) J1.19@3089.65,3821.89 ; U7.27@3665.75,3191 v1(3705.13,3191) ; U9.27@4393,3191 v1(4432.38,3191)
  Mid-Layer 2 w10: v1(2977.87,3191) 3080,3190 3200,3310 3200,3565 3089.6,3675.3 v1(3089.65,3776.26)
  Mid-Layer 3 w10: v1(3089.65,3776.26) 3089.65,3725.35 3113.05,3701.95 3693.05,3701.95 3930,3465 3930,3325 3795,3190 3706.13,3190 v1(3705.13,3191)
  Bottom Layer w10: v1(3705.13,3191) v1(4432.38,3191)
20: J1.20 U6.28 U7.28 U8.28 U9.28 | length 4249.8
  Top Layer w10: U8.28@2233,3211 2306,3211 2440,3345 2440,3490 2512.6,3562.6 2952.6,3562.6 3070,3680 v1@3070,3780.9 ; U6.28@2938.51,3210.99 v1(2977.87,3211) ; v1(3069.96,3776.26) J1.20@3069.96,3821.89 ; U7.28@3665.75,3211 v1(3705.13,3211) ; U9.28@4393,3211 v1(4432.38,3211)
  Mid-Layer 2 w10: v1(2977.87,3211) 3070,3210 3180,3320 3180,3560 3070,3670 v1(3069.96,3776.26)
  Mid-Layer 3 w10: v1(3069.96,3776.26) 3069.96,3705.04 3088.24,3686.76 3683.24,3686.76 3910,3460 3910,3335 3785,3210 v1@3710,3210
  Bottom Layer w10: v1(3705.13,3211) v1@4435,3211
21: J1.21 U6.29 U7.29 U8.29 U9.29 | length 4178.5
  Top Layer w10: U8.29@2233,3230 2300,3230 2420,3350 2420,3550 2447.8,3577.8 2942.8,3577.8 3050.3,3685.3 J1.21@3050.28,3821.89 ; U6.29@2938.51,3229.99 v1(2977.87,3230) ; U7.29@3665.75,3230 v1(3705.13,3230) ; U9.29@4393,3230 v1(4432.38,3230)
  Mid-Layer 2 w10: v1(2977.87,3230) 3060,3230 3160,3330 3160,3555 3050.28,3664.72 v1(3050.28,3776.26)
  Mid-Layer 3 w10: v1(3050.28,3776.26) 3050.28,3699.72 3078.43,3671.57 3673.43,3671.57 3890,3455 3890,3340 3780,3230 v1@3710,3230
  Bottom Layer w10: v1(3705.13,3230) v1(4432.38,3230)
22: J1.22 U6.30 U7.30 U8.30 U9.30 | length 4086.4
  Top Layer w10: U8.30@2233,3250 2295,3250 2400,3355 2400,3555 2438,3593 2933,3593 3030,3690 v1(3030.59,3776.26) ; U6.30@2938.51,3249.99 v1(2977.87,3250) ; v1(3030.59,3776.26) J1.22@3030.59,3821.89 ; U7.30@3665.75,3250 v1(3705.13,3250) ; U9.30@4393,3250 v1(4432.38,3250)
  Mid-Layer 2 w10: v1(2977.87,3250) 3050,3250 3140,3340 3140,3545 3030.59,3654.41 v1(3030.59,3776.26)
  Mid-Layer 3 w10: v1(3030.59,3776.26) 3030.59,3694.41 3068.62,3656.38 3663.62,3656.38 3870,3450 3870,3345 3775,3250 v1(3705.13,3250)
  Bottom Layer w10: v1(3705.13,3250) v1(4432.38,3250)
23: J1.23 U6.31 U7.31 U8.31 U9.31 | length 3990
  Top Layer w10: U8.31@2233,3270 2290,3270 2380,3360 2380,3560 2428.2,3608.2 2923.2,3608.2 3010.9,3695.9 v1(3010.91,3776.26) ; U6.31@2938.51,3269.99 v1(2977.87,3270) ; v1(3010.91,3776.26) J1.23@3010.91,3821.89 ; U7.31@3665.75,3270 v1(3705.13,3270) ; U9.31@4393,3270 v1(4432.38,3270)
  Mid-Layer 2 w10: v1(2977.87,3270) 3040,3270 3120,3350 3120,3535 3010.9,3644.1 v1(3010.91,3776.26)
  Mid-Layer 3 w10: v1(3010.91,3776.26) 3010.91,3689.09 3058.81,3641.19 3653.81,3641.19 3850,3445 3850,3350 3770,3270 v1(3705.13,3270)
  Bottom Layer w10: v1(3705.13,3270) v1(4432.38,3270)